# Altium PCB Flight_Controller.PcbDoc (part 1 of 4)
Units mil, origin at the board's own origin, x right, y up, seen from the top; angles counter-clockwise.
Board outline 2353.5 x 3084.1 mil, 4 copper layers (Top Layer, Layer 2, Layer 1, Bottom Layer), stack 62.48 mil thick; 95 components, 80 nets, 358 pads, 134 vias.
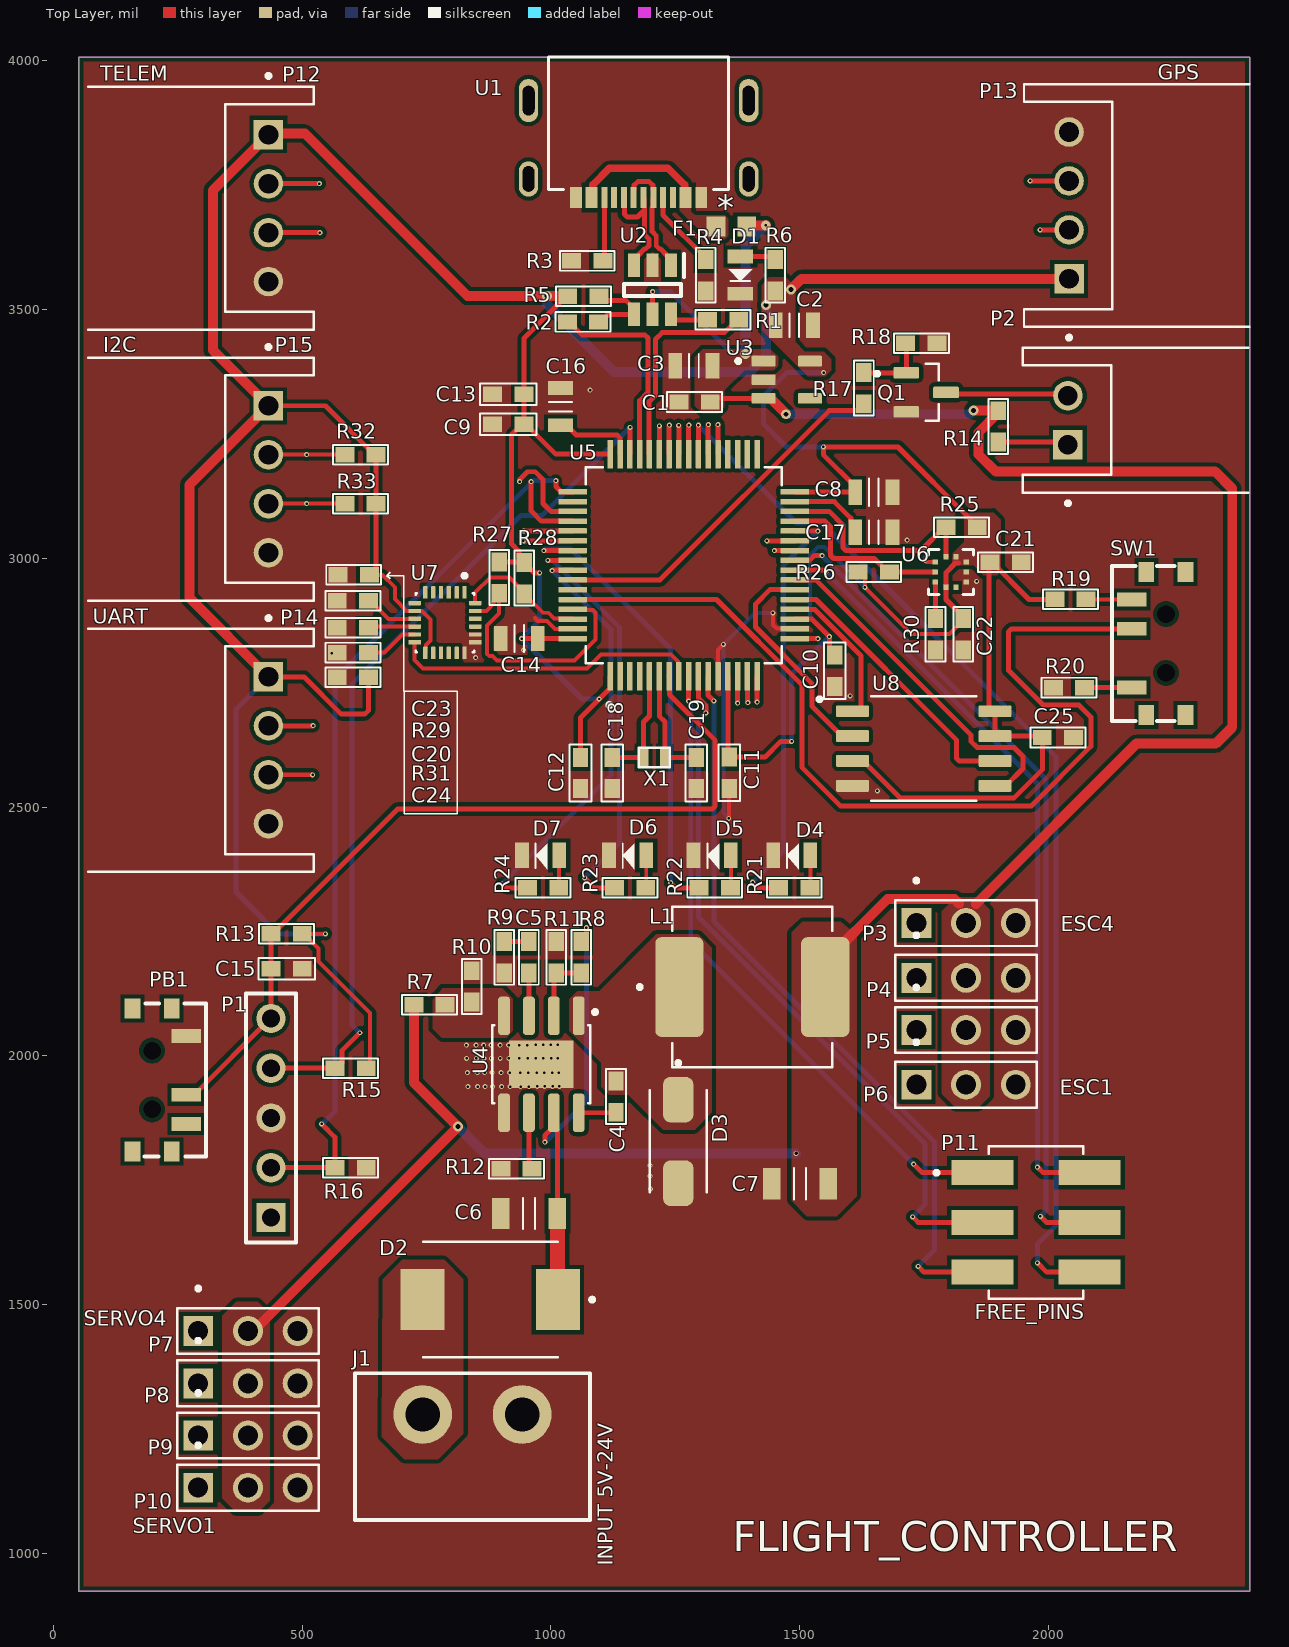
[diagram p0: Top Layer view]
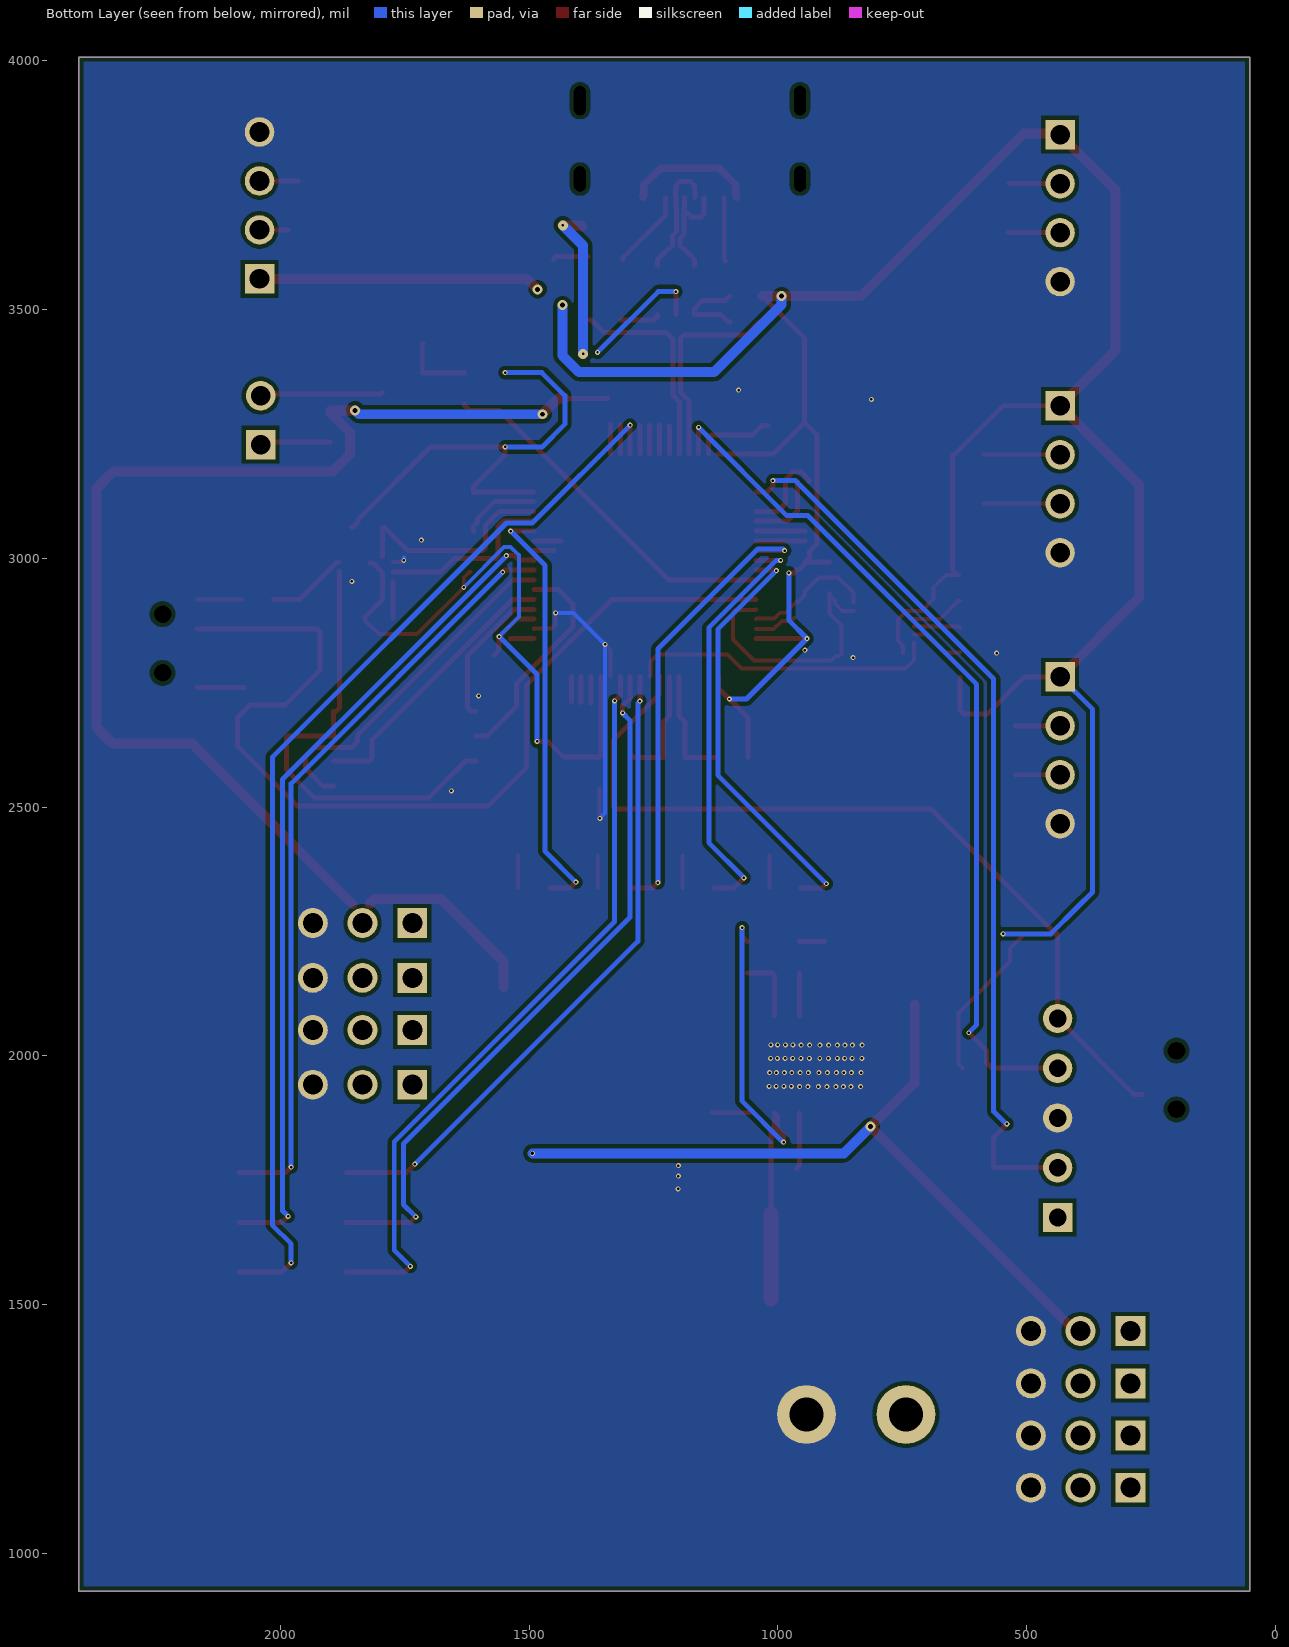
[diagram p1: Bottom Layer view, seen from below]
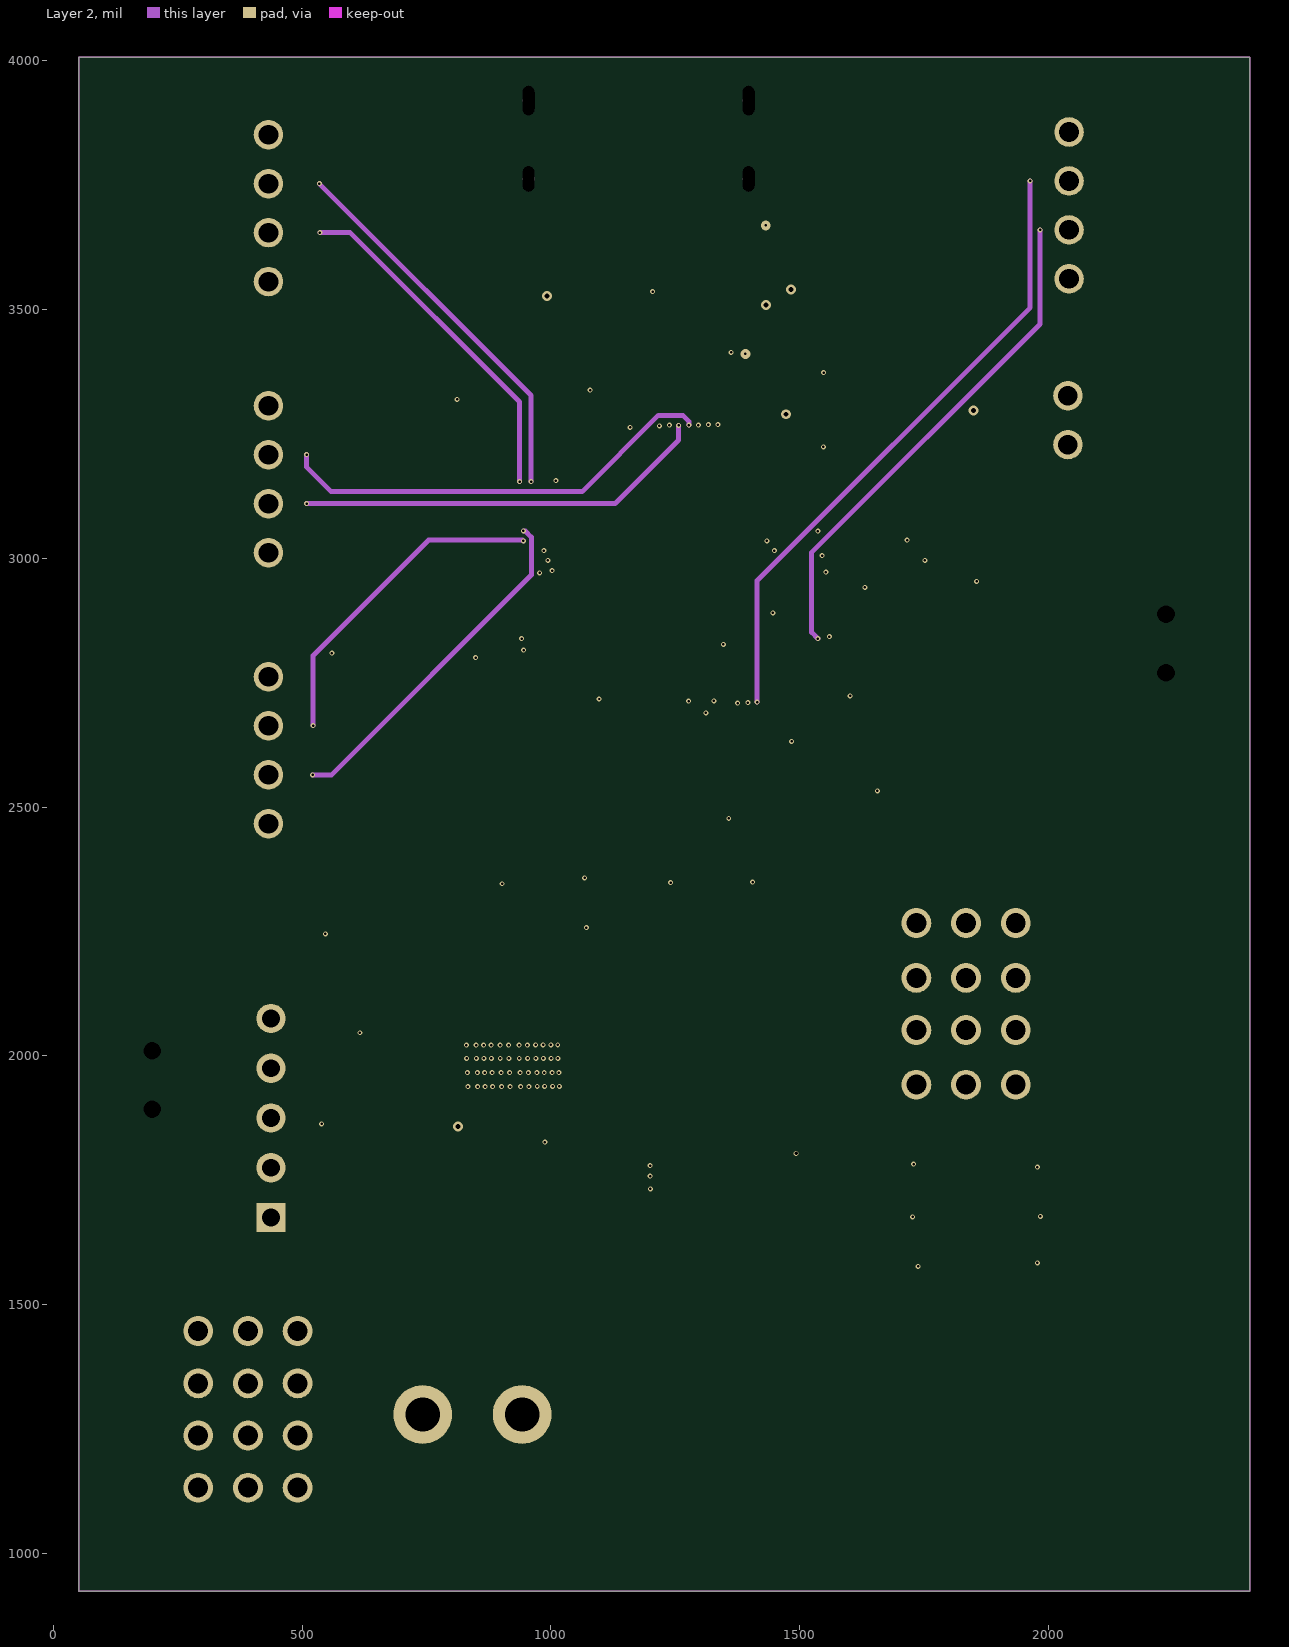
[diagram p2: Layer 2]
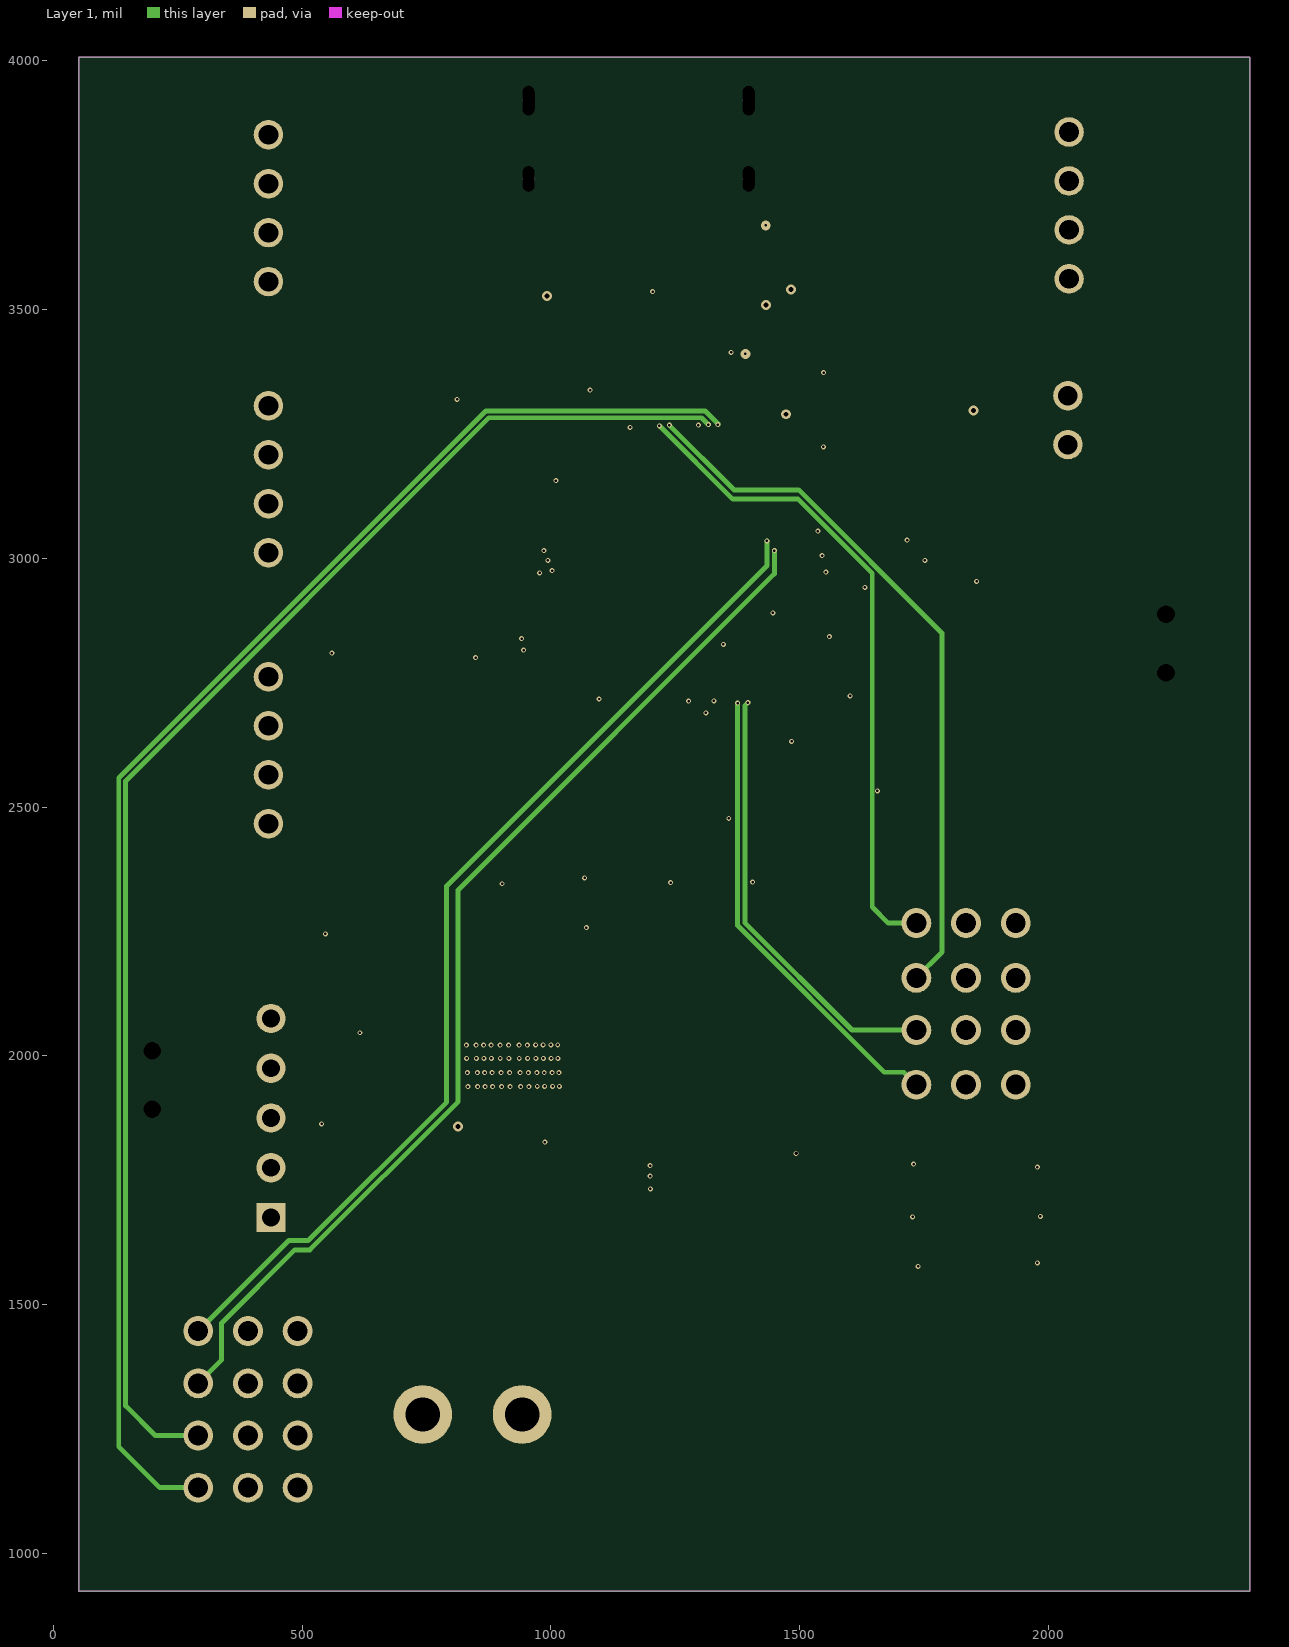
[diagram p3: Layer 1]
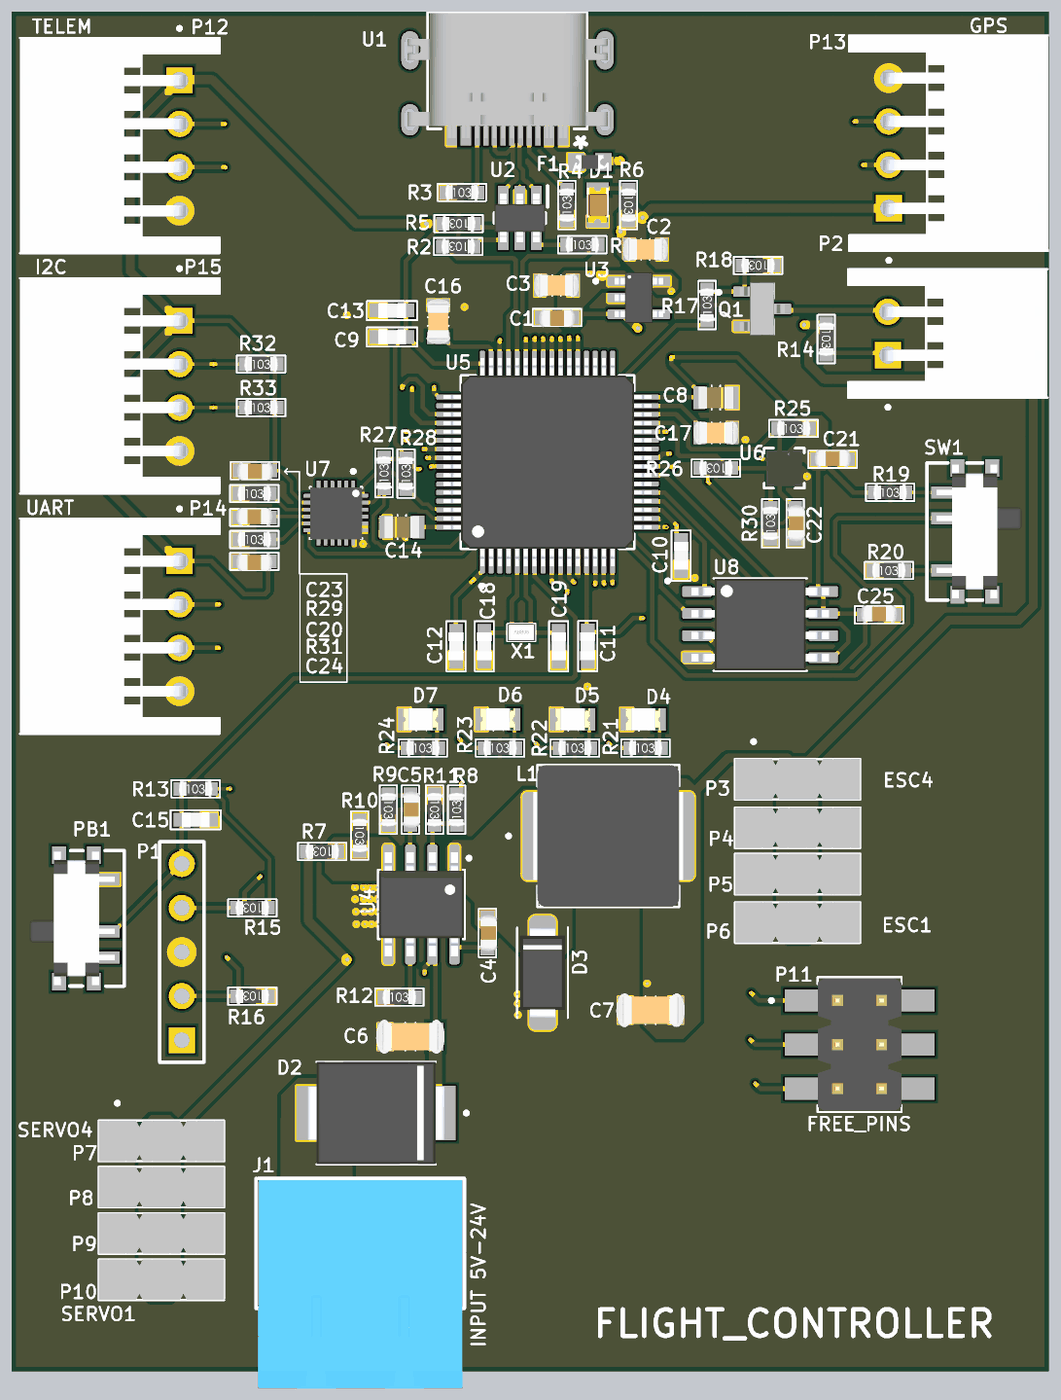
[diagram p5: 3D render of the assembled board from above, using the file's embedded part models]

## Layer stack, top to bottom
Top Solder: solder mask 0.4, Solder Resist, Dk 3.5
Top Layer: signal copper 1.4173
Dielectric 2: prepreg 8.2677, PP-006, Dk 4.1
Layer 2: signal copper 0.5906
Dielectric 1: dielectric 41.9291, FR-4, Dk 4.8
Layer 1: signal copper 0.5906
Dielectric 3: prepreg 8.2677, PP-006, Dk 4.1
Bottom Layer: signal copper 1.4173
Board Layer Stack Bottom Solder: solder mask 0.4, Solder Resist, Dk 3.5

## Board outline
51.5,923.9 51.5,4008 2405,4008 2405,923.9

## Design rules (kind name [scope] priority, off if disabled: settings)
Clearance [All] p1: gap=8 ignorepadtopadclearanceinfootprint=FALSE except(0: Arc-Hole Track-Hole SMDPad-SMDPad SMDPad-Hole THPad-Hole Via-Hole Fill-Hole Poly-Hole Region-Hole Text-Hole; 6: Arc-Arc Arc-Track Arc-SMDPad Arc-THPad Arc-Via Track-Track Track-SMDPad Track-THPad Track-Via SMDPad-THPad SMDPad-Via THPad-Via Via-Via)
DiffPairsRouting DiffPairsRouting_1 [InDifferentialPairClass('DIFFPAIRUSB')] p1: maxlimit=10 minlimit=10 mostfreqgap=10 toplayer_minwidth=15 toplayer_maxwidth=15 toplayer_prefwidth=15 midlayer1_minwidth=15 midlayer1_maxwidth=15 midlayer1_prefwidth=15 midlayer2_minwidth=15 midlayer2_maxwidth=15 midlayer2_prefwidth=15 bottomlayer_minwidth=15 bottomlayer_maxwidth=15 bottomlayer_prefwidth=15 maxuncoupledlength=500
DiffPairsRouting [All] p2: maxlimit=10 minlimit=5 mostfreqgap=5 toplayer_minwidth=10 toplayer_maxwidth=15 toplayer_prefwidth=10 midlayer1_minwidth=10 midlayer1_maxwidth=15 midlayer1_prefwidth=10 midlayer2_minwidth=10 midlayer2_maxwidth=15 midlayer2_prefwidth=10 bottomlayer_minwidth=10 bottomlayer_maxwidth=15 bottomlayer_prefwidth=10 maxuncoupledlength=500
MatchedLengths [InDifferentialPairClass('DIFFPAIRUSB')] p1: tolerance=1000 checknetsindiffpair=FALSE checkdiffpairvsdiffpair=TRUE checkxsignals=TRUE checkothers=TRUE
MinimumSolderMaskSliver [All] p1: minsoldermaskwidth=3
PlaneClearance [All] p1: clearance=15
PlaneConnect [All] p1: planeconnectstyle=Direct reliefexpansion=20 reliefentries=4 reliefconductorwidth=10 reliefairgap=10
PolygonConnect [All] p1: connectstyle=Direct reliefconductorwidth=10 reliefentries=4 polygonreliefangle="90 Angle" airgapwidth=10
RoutingVias [All] p1: holewidth=15 width=30 viastyle="Through Hole" minholewidth=10 minwidth=15 maxholewidth=50 maxwidth=100
SilkToSilkClearance [All] p1: silktosilkclearance=3
SilkToSolderMaskClearance [IsPad] p1: minsilkscreentomaskgap=3 clearancetoexposedcopper=TRUE
SolderMaskExpansion [All] p1: expansion=4 istentingtop=FALSE
Width [All] p1: maxlimit=50 minlimit=8 preferedwidth=10
24 further rules are at their usual default settings.

## Classes and differential pairs
differential pair class DIFFPAIRUSB: USB
component class POWER: C1 C2 C3 C4 C5 C6 C7 D1 D2 D3 F1 J1 L1 R1 R2 R3 R4 R5 R6 R7 R8 R9 R10 R11 R12 U1 U2 U3 U4
component class MODULES: C20 C21 C22 C23 C24 C25 P12 P13 P14 P15 R25 R26 R27 R28 R29 R30 R31 R32 R33 U6 U7 U8
component class MICROCONTROLLER: C8 C9 C10 C11 C12 C13 C14 C15 C16 C17 C18 C19 D4 D5 D6 D7 J2 P1 P2 P3 P4 P5 P6 P7 P8 P9 P10 P11 PB1 Q1 R13 R14 R15 R16 R17 R18 R19 R20 R21 R22 R23 R24 SW1 U5 X1
differential pair USB_CONN: +NetR2_2 -NetR1_2
differential pair USB: +USB_P -USB_N

## Components (designator, comment, footprint, x,y, rotation, side; value= is the part's Value field where it differs from the comment)
C1 "0603B103K160CT" CAP_0603#1 1289.1,3314.4 r0 top
C2 "CL21B105KBFNNNE" CAP_0805#1 1489.7,3468.9 r180 top
C3 "CL21B105KBFNNNE" CAP_0805#1 1287.7,3387.1 r0 top
C4 "C0603C104K5RACTU" CAP_0603#1 1131.2,1917.9 r90 top
C5 "CL10C200JB8NNNC" CAP_0603#1 956.2,2197.9 r90 top
C6 "C3216X5R1E336M160AC" CAP_1206 956.2,1682.9 r0 top
C7 "C3216X5R1E336M160AC" CAP_1206 1501.2,1742.9 r0 top
C8 "CL21A475KAQNNNE" CAP_0805#2 1649.5,3132.6 r180 top
C9 "CAP CER 100nF 0603" CAP_0603#2 914.6,3270 r0 top
C10 "CAP CER 100nF 0603" CAP_0603#2 1570.7,2774.1 r90 top
C11 "CAP CER 100nF 0603" CAP_0603#2 1358.7,2568.9 r90 top
C12 "CAP CER 100nF 0603" CAP_0603#2 1059.79,2568.48 r90 top
C13 "CAP CER 100nF 0603" CAP_0603#2 914.6,3330 r0 top
C14 "CAP_CER_1uF 0805" CAP_0805#2 936.7,2838.9 r0 top
C15 "CAP CER 100nF 0603" CAP_0603#2 469,2175 r180 top
C16 "CL21B105KBFNNNE" CAP_0805#1 1019.6,3305 r270 top
C17 "CL21B105KBFNNNE" CAP_0805#1 1649.5,3052.6 r180 top
C18 "CAP_CER_20pF" CAP_0603#2 1124,2568.48 r90 top
C19 "CAP_CER_20pF" CAP_0603#2 1292.74,2568.48 r90 top
C20 "0603B103K160CT" CAP_0603#1 602.3,2860.7 r180 top
C21 "0603B103K160CT" CAP_0603#1 1914.5,2992.6 r180 top
C22 "0603B103K160CT" CAP_0603#1 1829.5,2847.48 r90 top
C23 "0603B103K160CT" CAP_0603#1 603.79,2966.96 r0 top
C24 "0603B103K160CT" CAP_0603#1 602.3,2760.7 r0 top
C25 "0603B103K160CT" CAP_0603#1 2019.7,2639.9 r180 top
D1 "LH R974-LP-1" LED_RED_0805 1381.4,3569.4 r90 top
D2 "MBRS320" DIOM7959 878.5,1509.7 r180 top
D3 "B340A-13F" DIOM522 1256.2,1827.9 r270 top
D4 "LED_GREEN_0805" LED_GREEN_0805 1484.6,2402.8 r0 top
D5 "LED_GREEN_0805" LED_GREEN_0805 1324.6,2402.8 r0 top
D6 "LED_GREEN_0805" LED_GREEN_0805 1154.6,2402.8 r0 top
D7 "LED_GREEN_0805" LED_GREEN_0805 979.6,2402.8 r0 top
F1 "FUSE_PTC" FUSE_0603 1363.2,3667.1 r180 top
J1 "TBP01R1-508-02BE" TBP01R1-508 842.48,1279 r0 top
L1 "IND 15uH 3232" INDM868 1405.2,2138.2 r0 top
P1 "Header 5" HDR1X5 437.5,1675 r90 top
P2 "Connector Header Through Hole" S2B-XH-A 2039.8,3278.01 r90 top
P3 "Header 3 pin" "5-146281-3 header" 1834.9,2266.8 r0 top
P4 "Header 3 pin" "5-146281-3 header" 1834.9,2156.8 r0 top
P5 "Header 3 pin" "5-146281-3 header" 1834.9,2051.8 r0 top
P6 "Header 3 pin" "5-146281-3 header" 1834.9,1941.8 r0 top
P7 "Header 3 pin" "5-146281-3 header" 391.3,1446.6 r0 top
P8 "Header 3 pin" "5-146281-3 header" 391.3,1341.6 r0 top
P9 "Header 3 pin" "5-146281-3 header" 391.3,1236.6 r0 top
P10 "Header 3 pin" "5-146281-3 header" 391.3,1131.6 r0 top
P11 "Connector 2x3 SMD" AMPHENOL 1975.5,1665 r270 top
P12 "HEADER 4 PIN" S4B-XH-A 432.5,3704.21 r270 top
P13 "HEADER 4 PIN" S4B-XH-A 2042,3709.59 r90 top
P14 "HEADER 4 PIN" S4B-XH-A 432.5,2614.21 r270 top
P15 "HEADER 4 PIN" S4B-XH-A 432.5,3159.21 r270 top
PB1 "EG1215AA" EG1215AA#1 198.5,1951.3 r270 top
Q1 "BC817" SOT95P23 1754.8,3333.8 r0 top
R1 "RC0603FR-0710KL" RES_0603#1 1346.4,3479.4 r0 top
R2 "RC0603FR-0710KL" RES_0603#1 1064.8,3475.3 r180 top
R3 "RC0603FR-0710KL" RES_0603#1 1073.3,3598 r0 top
R4 "RC0603FR-0710KL" RES_0603#1 1311.4,3569.4 r90 top
R5 "RC0603FR-0710KL" RES_0603#1 1065.7,3527.2 r180 top
R6 "RC0603FR-0710KL" RES_0603#1 1451.4,3569.4 r270 top
R7 "RC0603JR-07220KL" RES_0603#1 756.2,2102.9 r180 top
R8 "RC0603JR-07220KL" RES_0603#1 1061.2,2197.9 r90 top
R9 "RC0603JR-07220KL" RES_0603#1 906.2,2197.9 r270 top
R10 "RC0603JR-07220KL" RES_0603#1 841.2,2139.4 r270 top
R11 "RC0603JR-0743KL" RES_0603#1 1011.2,2197.9 r270 top
R12 "RC0603JR-07220KL" RES_0603#1 931.2,1772.9 r0 top
R13 "RC0603FR-0710KL" RES_0603#1 469,2245 r0 top
R14 "RC0603JR-0715RL" RES_0603#1 1899.8,3265.3 r270 top
R15 "RC0603FR-0710KL" RES_0603#2 597.5,1975 r180 top
R16 "RC0603FR-0710KL" RES_0603#2 597.5,1775 r180 top
R17 "RC0603FR-0710KL" RES_0603#1 1629.7,3342.4 r90 top
R18 "RC0603FR-0710KL" RES_0603#1 1745.1,3432.3 r180 top
R19 "RC0603FR-0710KL" RES_0603#1 2045,2917.48 r0 top
R20 "RC0603FR-0710KL" RES_0603#1 2041.9,2740.32 r0 top
R21 "RC0603FR-0710KL" RES_0603#1 1489.6,2337.8 r0 top
R22 "RC0603FR-0710KL" RES_0603#1 1329.6,2337.8 r0 top
R23 "RC0603FR-0710KL" RES_0603#1 1159.6,2337.8 r0 top
R24 "RC0603FR-0710KL" RES_0603#1 984.6,2337.8 r0 top
R25 "RC0603FR-0710KL" RES_0603#1 1826,3062.6 r0 top
R26 "RC0603FR-0710KL" RES_0603#1 1649.5,2972.6 r180 top
R27 "RC0603FR-0710KL" RES_0603#1 896.4,2961.5 r90 top
R28 "RC0603FR-0710KL" RES_0603#1 946.4,2960.3 r90 top
R29 "RC0603FR-0710KL" RES_0603#1 602.3,2914.72 r0 top
R30 "RC0603FR-0710KL" RES_0603#1 1773.5,2847.48 r90 top
R31 "RC0603FR-0710KL" RES_0603#1 602.3,2810.7 r0 top
R32 "RC0603FR-0710KL" RES_0603#1 617.5,3208.43 r0 top
R33 "RC0603FR-0710KL" RES_0603#1 617.5,3110 r0 top
SW1 "EG1215AA" EG1215AA#2 2236.9,2828.9 r90 top
U1 "USB_C 24PIN" USB_2169900002 1176.6,3875.1 r180 top
U2 "USB_LC62" SOT-23-6 1204.6,3539.7 r270 top
U3 "NCP718B" SOT95-P 1474.6,3359.3 r0 top
U4 "MP1584EN" SOIC127 981.2,1982.9 r270 top
U5 "STM32F405RGT6" QFP50P_STM32 1267.4,2986.2 r90 top
U6 "BMP390" WFLGA-10 1804.5,2972.6 r270 top
U7 "I" TFQFN-24 787.3,2870.7 r270 top
U8 "25LC1024 EEPROM" SOIJ8 1750,2617.7 r0 top
X1 "CRYSTAL 32.768kHz" ABS05-32.768KHZ-T 1208.02,2599.98 r0 top

## Footprints (in the part's own frame and the unit in brackets; to place one, negate y for a bottom-side part, rotate by r counter-clockwise, add the part's x,y. Pads: shape width x height; smd on the part's side, far side on the other; paste and mask are expansions set on the pad)
"5-146281-3 header" [mm]
  rect 1.53x1.53 / inner round 1.53 / far side rect 1.53x1.53 hole 1.02: 1(-2.54,0)
  round 1.53 hole 1.02: 2(0,0) 3(2.54,0)
  silkscreen extent -3.61,-1.17 3.61,2.27, body extent -3.61,-1.17 3.61,1.17, height 5.33
ABS05-32.768KHZ-T [mm]
  rect 0.5x1 smd: 1(-0.55,0) 2(0.55,0)
  silkscreen extent -0.8,-0.5 0.8,0.5, body extent -0.8,-0.5 0.8,0.5, height 0.5
AMPHENOL [mm]
  rect 1.27x3.18 smd: A01(-2.54,-2.73) A02(0,-2.73) A03(2.54,-2.73) B01(-2.54,2.73) B02(0,2.73) B03(2.54,2.73)
  silkscreen extent -3.89,-5.18 3.89,2.41, body extent -3.81,-3.68 3.81,3.68, height 8.59
CAP_0603#1 [mil]
  rect 38x31 smd mask+1.97: 1(-31.5,0) 2(31.5,0)
  silkscreen extent -55,-20 55,20, body extent -41,-22 41,18, height 31
CAP_0603#2 [mil]
  rect 38x31 smd mask+4: 1(-31.5,0) 2(31.5,0)
  silkscreen extent -57,-22 57,22, body extent -31,-17 31,17, height 34
CAP_0805#1 [mm]
  rect 0.7x1.3 smd mask+0.05: 1(-0.95,0) 2(0.95,0)
  silkscreen extent -0.25,-0.6 0.25,0.6, body extent -1.3,-0.68 1.3,0.68, height 0.9
CAP_0805#2 [mm]
  rect 0.7x1.3 smd mask+0.102: 1(-0.95,0) 2(0.95,0)
  silkscreen extent -0.25,-0.7 0.25,0.7, body extent -1,-0.63 1,0.63, height 1.35
CAP_1206 [mm]
  rect 0.9x1.6 smd mask+0.05: 1(-1.45,0) 2(1.45,0)
  silkscreen extent -0.3,-0.8 0.3,0.8, body extent -1.97,-0.98 1.97,0.98, height 1.3
DIOM522 [mm]
  rrect50% 2.33x1.55 smd: A(2.135,0) C(-2.135,0)
  silkscreen extent -4.1,-1.46 2.6,1.46, body extent -2.6,-1.3 2.6,1.3, height 2.4
DIOM7959 [mm]
  rect 2.25x3.12 smd: A(3.455,0) C(-3.455,0)
  silkscreen extent -5.3,-2.95 3.44,2.95, body extent -3.98,-2.95 3.98,2.95, height 2.62
EG1215AA#1 [mm]
  rect 0.7x1.5 smd mask+0.102: 1(-2.25,1.75) 2(0.75,1.75) 3(2.25,1.75)
  rect 1x0.8 smd mask+0.102: " "(-3.65,-1) " "(-3.65,1) " "(3.65,-1) " "(3.65,1)
  round 0 hole 0.9 mask+0.102: ""(-1.5,0) ""(1.5,0)
  silkscreen extent -3.9,-0.38 3.9,2.75, body extent -3.85,-2.7 3.85,2.2, height 1.4
EG1215AA#2 [mm]
  rect 0.7x1.5 smd mask+0.05: 1(-2.25,1.75) 2(0.75,1.75) 3(2.25,1.75)
  rect 1x0.8 smd mask+0.05: ""(-3.65,-1) ""(-3.65,1) ""(3.65,-1) ""(3.65,1)
  round 0 hole 0.9 mask+0.05: ""(-1.5,0) ""(1.5,0)
  silkscreen extent -3.95,-0.45 3.95,2.75, body extent -3.85,-2.7 3.85,2.2, height 1.38
FUSE_0603 [mm]
  rect 0.95x1.02 smd paste+0 mask+0.102: 1(-0.785,0) 2(0.785,0)
  body extent -0.8,-0.4 0.8,0.4, height 0.75
HDR1X5 [mm] "Connector; Header; 5 Position"
  rect 1.5x1.5 hole 0.9: 1(0,0)
  round 1.5 hole 0.9: 2(2.54,0) 3(5.08,0) 4(7.62,0) 5(10.16,0)
  silkscreen extent -1.27,-1.27 11.43,1.27
INDM868 [mm]
  rrect25% 2.46x5.09 smd paste+0 mask+0.102: 1(-3.725,0) 2(3.725,0)
  silkscreen extent -5.85,-4.09 4.09,4.09, body extent -4.32,-4.09 4.32,4.09, height 4.01
LED_GREEN_0805 [mm]
  rect 0.7x1.3 smd mask+0.102: 1(-0.95,0) 2(0.95,0)
  silkscreen extent -0.25,-0.7 0.35,0.6, body extent -1,-0.63 1,0.63, height 0.8
LED_RED_0805 [mm]
  rect 0.7x1.3 smd mask+0.05: 1(-0.95,0) 2(0.95,0)
  silkscreen extent -0.3,-0.6 0.3,0.6, body extent -1.01,-0.63 1.01,0.62, height 1.1
QFP50P_STM32 [mm]
  rrect25% 1.47x0.28 smd: 1(-5.67,3.75) 2(-5.67,3.25) 3(-5.67,2.75) 4(-5.67,2.25) 5(-5.67,1.75) 6(-5.67,1.25) 7(-5.67,0.75) 8(-5.67,0.25) 9(-5.67,-0.25) 10(-5.67,-0.75) 11(-5.67,-1.25) 12(-5.67,-1.75) 13(-5.67,-2.25) 14(-5.67,-2.75) 15(-5.67,-3.25) 16(-5.67,-3.75) 33(5.67,-3.75) 34(5.67,-3.25) 35(5.67,-2.75) 36(5.67,-2.25) 37(5.67,-1.75) 38(5.67,-1.25) 39(5.67,-0.75) 40(5.67,-0.25) 41(5.67,0.25) 42(5.67,0.75) 43(5.67,1.25) 44(5.67,1.75) 45(5.67,2.25) 46(5.67,2.75) 47(5.67,3.25) 48(5.67,3.75)
  rrect25% 0.28x1.47 smd: 17(-3.75,-5.67) 18(-3.25,-5.67) 19(-2.75,-5.67) 20(-2.25,-5.67) 21(-1.75,-5.67) 22(-1.25,-5.67) 23(-0.75,-5.67) 24(-0.25,-5.67) 25(0.25,-5.67) 26(0.75,-5.67) 27(1.25,-5.67) 28(1.75,-5.67) 29(2.25,-5.67) 30(2.75,-5.67) 31(3.25,-5.67) 32(3.75,-5.67) 49(3.75,5.67) 50(3.25,5.67) 51(2.75,5.67) 52(2.25,5.67) 53(1.75,5.67) 54(1.25,5.67) 55(0.75,5.67) 56(0.25,5.67) 57(-0.25,5.67) 58(-0.75,5.67) 59(-1.25,5.67) 60(-1.75,5.67) 61(-2.25,5.67) 62(-2.75,5.67) 63(-3.25,5.67) 64(-3.75,5.67)
  silkscreen extent -7.24,-5 5,5, body extent -6,-6 6,6, height 1.6
RES_0603#1 [mil]
  rect 38x31 smd mask+1.97: 1(-31.5,0) 2(31.5,0)
  silkscreen extent -55,-20 55,20, body extent -39,-19 39,20, height 17
RES_0603#2 [mil]
  rect 38x31 smd mask+4: 1(-31.5,0) 2(31.5,0)
  silkscreen extent -55,-20 55,20, body extent -39,-19 39,20, height 17
S2B-XH-A [mm]
  rect 1.508x1.508 / inner round 1.508 / far side rect 1.508x1.508 hole 1: 1(-1.25,0)
  round 1.508 hole 1: 2(1.25,0)
  silkscreen extent -4.35,-9.2 3.7,2.3, body extent -3.7,-9.2 3.7,2.3, height 6.1
S4B-XH-A [mm]
  rect 1.508x1.508 / inner round 1.508 / far side rect 1.508x1.508 hole 1: 1(-3.75,0)
  round 1.508 hole 1: 2(-1.25,0) 3(1.25,0) 4(3.75,0)
  silkscreen extent -6.85,-9.2 6.2,2.3, body extent -6.2,-9.2 6.2,2.3, height 6.1
SOIC127 [mm]
  rrect54% 1.97x0.6 smd paste+0 mask+0.102: 1(-2.475,1.905) 2(-2.475,0.635) 3(-2.475,-0.635) 4(-2.475,-1.905) 5(2.475,-1.905) 6(2.475,-0.635) 7(2.475,0.635) 8(2.475,1.905)
  rect 2.41x3.3 smd paste-3 mask+0.102: 9(0,0)
  silkscreen extent -2.77,-2.5 2,2.84, body extent -3,-2.45 3,2.45, height 1.7
SOIJ8 [mm]
  rrect25% 1.69x0.61 smd: 1(-3.64,1.905) 2(-3.64,0.635) 3(-3.64,-0.635) 4(-3.64,-1.905) 5(3.64,-1.905) 6(3.64,-0.635) 7(3.64,0.635) 8(3.64,1.905)
  silkscreen extent -5.43,-2.67 2.69,2.67, body extent -3.97,-2.63 3.97,2.63, height 2.03
SOT95-P [mm]
  rrect25% 1.24x0.55 smd: 1(-1.185,0.95) 2(-1.185,0) 3(-1.185,-0.95) 4(1.185,-0.95) 5(1.185,0.95)
  silkscreen extent -2.58,0.85 -2.38,1.05, body extent -1.4,-1.45 1.4,1.45, height 1
SOT95P23 [mm]
  rrect25% 1.32x0.59 smd: 1(-1.015,1) 2(-1.015,-1) 3(1.015,0)
  silkscreen extent -2.6,-1.46 0.65,1.46, body extent -1.31,-1.52 1.29,1.52, height 1.2
SOT-23-6 [mm]
  rect 1.2x0.6 smd: 1(-1.25,0.95) 2(-1.25,0) 3(-1.25,-0.95) 4(1.25,-0.95) 5(1.25,0) 6(1.25,0.95)
  silkscreen extent -1.85,-1.46 0.3,1.6, body extent -1.4,-1.46 1.4,1.46, height 1.4
TBP01R1-508 [mm]
  round 3 hole 1.75 mask+0.05: 1(-2.54,0) 2(2.54,0)
  silkscreen extent -6,-5.4 6,2.1, body extent -5.88,-10 5.88,2, height 8.55
TFQFN-24 [mm]
  rrect25% 0.64x0.22 smd: 1(-1.545,1) 2(-1.545,0.6) 3(-1.545,0.2) 4(-1.545,-0.2) 5(-1.545,-0.6) 6(-1.545,-1) 13(1.545,-1) 14(1.545,-0.6) 15(1.545,-0.2) 16(1.545,0.2) 17(1.545,0.6) 18(1.545,1)
  rrect25% 0.22x0.64 smd: 7(-1,-1.545) 8(-0.6,-1.545) 9(-0.2,-1.545) 10(0.2,-1.545) 11(0.6,-1.545) 12(1,-1.545) 19(1,1.545) 20(0.6,1.545) 21(0.2,1.545) 22(-0.2,1.545) 23(-0.6,1.545) 24(-1,1.545)
  silkscreen extent -2.5,-1.5 1.5,1.5, body extent -1.49,-1.49 1.51,1.51, height 1
USB_2169900002 [mil]
  oval 39x87 smd: 13(-221.26,-45.23) 14(221.26,-45.24)
  oval 39x71 smd: 15(-221.26,112.25) 16(221.26,112.24)
  rect 24x43 smd: A1/B12(-126,149.5) A4/B9(-94.5,149.5) B1/A12(126.01,149.5) B4/A9(94.51,149.5)
  rect 12x43 smd: A5(-49.23,149.5) A6(-9.84,149.5) A7(9.85,149.5) A8(49.23,149.5) B5(68.91,149.5) B6(29.54,149.5) B7(-29.53,149.5) B8(-68.91,149.5)
  round 24 hole 24.02 slot 59.06 at 90 deg unplated: ""(-221.26,-45.23) ""(221.26,-45.24)
  round 24 hole 24 slot 51.18 at 90 deg unplated: ""(-221.26,112.25) ""(221.26,112.24)
  silkscreen extent -181,-133 181,133, body extent -227,-130 227,154, height 94
WFLGA-10 [mil]
  rect 11x10 smd paste+0 mask+0: 1(-31,9.84) 2(-31,-9.84) 6(31,-9.84) 7(31,9.84)
  rect 10x11 smd paste+0 mask+0: 3(-19.68,-31) 4(0,-31) 5(19.68,-31) 8(19.68,31) 9(0,31) 10(-19.68,31)
  silkscreen extent -46,-45 46,46, body extent -41,-41 41,41, height 32

## Part data
C1 C20 C21 C22 C23 C24 C25: library part "CAP CER 10nF 0603", "CAP CER 10nF %10 0603", Capacitance=10nF, Case Code (Metric)=1608, Case Code (Imperial)=0603, Dielectric=X7R, Manufacturer="Walsin Technologies", Max Operating Temperature=125°C, Min Operating Temperature=-55°C, Supplier Part Number 1=1292-1384-1-ND, Tolerance=10%, Voltage Rating=16V, Case/Package=0603, Category="Ceramic Capacitors", ComponentLink1Description=http://www.farnell.com/datasheets/1958513.pdf?src-supplier=Farnell, ComponentLink1URL=http://www.farnell.com/datasheets/1958513.pdf?src-supplier=Farnell, ComponentLink2Description=http://components.arrow.com/part/dataview/0323_00656382?src-supplier=Arrow+Europe, ComponentLink2URL=http://components.arrow.com/part/dataview/0323_00656382?src-supplier=Arrow+Europe, ComponentLink3Description=http://www.farnell.com/datasheets/1958513.pdf?src-supplier=Element14, ComponentLink3URL=http://www.farnell.com/datasheets/1958513.pdf?src-supplier=Element14, ComponentLink4Description=http://www.passivecomponent.com/wp-content/uploads/2018/10/MLCC.pdf?src-supplier=Digi-Key, ComponentLink4URL=http://www.passivecomponent.com/wp-content/uploads/2018/10/MLCC.pdf?src-supplier=Digi-Key, Depth=0.8mm, Designed by=BERK, Length=1.6mm, Manufacturer Part Number=0603B103K160CT, Packaging="Tape and Reel", Pricing 1="1=0,10000, 10=0,03600, 50=0,01940, 100=0,01590, 500=0,01136, 1000=0,00892 (USD)", REACH SVHC=Unknown, RoHS=Yes, RoHS Compliant=Yes, Stock 1=102474, Supplier 1=Digi-Key, Voltage Rating (DC)=16V
C2 C3 C16 C17: library part "CAP CER 1uF 0805", "CAP CER 1uF %10 0805", Capacitance=1uF, Case Code (Metric)=2012, Case Code (Imperial)=0805, Dielectric=X7R, Manufacturer=Samsung, Max Operating Temperature=125°C, Min Operating Temperature=-55°C, Package Quantity=1, Supplier Part Number 1=1276-1029-2-ND, Tolerance=10%, Voltage=50V, Case/Package=0805, Category="Ceramic Capacitors", ComponentLink1Description=https://datasheet.ciiva.com/25800/cl21b105kbfnnne-25800291.pdf?src-supplier=Digi-Key, ComponentLink1URL=https://datasheet.ciiva.com/25800/cl21b105kbfnnne-25800291.pdf?src-supplier=Digi-Key, ComponentLink2Description=https://datasheet.ciiva.com/16449/cl21b105kbfnnne-16449003.pdf?src-supplier=Future+Electronics, ComponentLink2URL=https://datasheet.ciiva.com/16449/cl21b105kbfnnne-16449003.pdf?src-supplier=Future+Electronics, ComponentLink3Description=https://datasheet.ciiva.com/26838/getdatasheetpartid-354075-26838668.pdf?src-supplier=Verical, ComponentLink3URL=https://datasheet.ciiva.com/26838/getdatasheetpartid-354075-26838668.pdf?src-supplier=Verical, Construction=Flat, Depth=1.25mm, Designed by=BERK, Height=1.25mm, Length=2mm, Manufacturer Part Number=CL21B105KBFNNNE, Mount="Surface Mount", Packaging="Tape and Reel", Pricing 1="2000=0,02138, 4000=0,01956 (USD)", Radiation Hardening=No, RoHS=Yes, RoHS Compliant=Yes, Series=CL, Stock 1=958000, Supplier 1=Digi-Key, Thickness=0.053inch, Voltage Rating=50V, Width=0.049inch
C4: library part "CAP CER 100nF 0603", "CAP CER 100nF %10 0603 SMD", Capacitance=100nF, Case Code (Metric)=1608, Case Code (Imperial)=0603, Dielectric=X7R, Dielectric Material=Ceramic, Manufacturer=KEMET, Max Operating Temperature=125°C, Min Operating Temperature=-55°C, Package Quantity=1, Supplier Part Number 1=399-5089-1-ND, Tolerance=10%, Voltage=50V, Case/Package=0603, Category="Ceramic Capacitors", ComponentLink1Description=https://datasheet.ciiva.com/7823/kem-c1002-x7r-smd-7823591.pdf?src-supplier=Element14, ComponentLink1URL=https://datasheet.ciiva.com/7823/kem-c1002-x7r-smd-7823591.pdf?src-supplier=Element14, ComponentLink2Description=https://datasheet.ciiva.com/14602/70095383-14602583.pdf?src-supplier=Allied+Electronics, ComponentLink2URL=https://datasheet.ciiva.com/14602/70095383-14602583.pdf?src-supplier=Allied+Electronics, ComponentLink3Description=https://datasheet.ciiva.com/5999/kem-c1002-x7r-smd-5999400.pdf?src-supplier=Farnell, ComponentLink3URL=https://datasheet.ciiva.com/5999/kem-c1002-x7r-smd-5999400.pdf?src-supplier=Farnell, ComponentLink4Description=https://datasheet.ciiva.com/7823/kem-c1002-x7r-smd-7823592.pdf?src-supplier=Element14, ComponentLink4URL=https://datasheet.ciiva.com/7823/kem-c1002-x7r-smd-7823592.pdf?src-supplier=Element14, ComponentLink5Description=https://datasheet.ciiva.com/28645/1851736-28645640.pdf?src-supplier=Element14, ComponentLink5URL=https://datasheet.ciiva.com/28645/1851736-28645640.pdf?src-supplier=Element14, ComponentLink6Description=https://datasheet.ciiva.com/14585/70095383-14585209.pdf?src-supplier=Allied+Electronics, ComponentLink6URL=https://datasheet.ciiva.com/14585/70095383-14585209.pdf?src-supplier=Allied+Electronics, Contact Plating=Tin,Matte, Depth=0.8mm, Designed by=BERK, Dissipation Factor=2.5%, Height=0.8mm, Lead Pitch=0.7mm, Length=0.063inch, Manufacturer Part Number=C0603C104K5RACTU, Mount="Surface Mount", Number of Pins=2, Packaging="Tape and Reel", Pricing 1="1=0,12000, 10=0,08500, 50=0,04620, 100=0,03770, 500=0,02696, 1000=0,02118 (USD)", Radiation Hardening=No, REACH SVHC="No SVHC", RoHS=Yes, RoHS Compliant=Yes, Series="SMD Comm X7R", Stock 1=1666186, Supplier 1=Digi-Key, Termination=SMD/SMT, Thickness=0.034inch, Voltage Rating=50V, Voltage Rating (DC)=50V, Width=0.031inch
C5: library part "CAP CER 20pF 0603", "CAP CER 20pF %5 0603 SMD", Capacitance=20pF, Case Code (Metric)=1608, Case Code (Imperial)=0603, Dielectric=C0G, Manufacturer=Samsung, Max Operating Temperature=125°C, Min Operating Temperature=-55°C, Package Quantity=1, Supplier Part Number 1=1276-1187-1-ND, Temperature Coefficient=300ppm/°C, Tolerance=5%, Voltage=50V, Case/Package=0603, Category="Ceramic Capacitors", ComponentLink1Description=https://datasheet.ciiva.com/26877/getdatasheetpartid-640634-26877974.pdf?src-supplier=Verical, ComponentLink1URL=https://datasheet.ciiva.com/26877/getdatasheetpartid-640634-26877974.pdf?src-supplier=Verical, ComponentLink2Description=https://datasheet.ciiva.com/26310/mlcc-catalogdownload2013-eng-26310315.pdf?src-supplier=Distrelec, ComponentLink2URL=https://datasheet.ciiva.com/26310/mlcc-catalogdownload2013-eng-26310315.pdf?src-supplier=Distrelec, Construction=Flat, Depth=0.8mm, Designed by=BERK, Height=0.8mm, Length=1.6mm, Manufacturer Part Number=CL10C200JB8NNNC, Mount="Surface Mount", Packaging="Tape and Reel", Pricing 1="1=0,10000, 10=0,04700, 50=0,02560, 100=0,02090, 500=0,01490, 1000=0,01171 (USD)", Radiation Hardening=No, RoHS=Yes, RoHS Compliant=Yes, Series=CL, Stock 1=765558, Supplier 1=Digi-Key, Thickness=0.035inch, Voltage Rating=50V, Width=0.031inch
C6 C7: library part "CAP CER 33uF 1206", "CAP CER 33uF %20 1206 SMD", Capacitance=33uF, Case Code (Metric)=3216, Case Code (Imperial)=1206, Dielectric=X5R, Dielectric Material=Ceramic, Manufacturer=TDK, Max Operating Temperature=85°C, Min Operating Temperature=-55°C, Package Quantity=1, Supplier Part Number 1=445-8046-1-ND, Tolerance=20%, Voltage Rating=25V, Case/Package=1206, Category="Ceramic Capacitors", ComponentLink1Description=https://datasheet.ciiva.com/24216/c3216x5r1e336m160ac-265051-24216512.pdf?src-supplier=Mouser, ComponentLink1URL=https://datasheet.ciiva.com/24216/c3216x5r1e336m160ac-265051-24216512.pdf?src-supplier=Mouser, ComponentLink2Description=https://datasheet.ciiva.com/6285/tdkmlcccaprange-6285278.pdf?src-supplier=Digi-Key, ComponentLink2URL=https://datasheet.ciiva.com/6285/tdkmlcccaprange-6285278.pdf?src-supplier=Digi-Key, Depth=1.6mm, Designed by=BERK, Lead Free="Lead Free", Length=3.2mm, Manufacturer Part Number=C3216X5R1E336M160AC, Mount="Surface Mount", Packaging="Tape and Reel", Pricing 1="1=1,04000, 10=0,82500, 50=0,71500, 100=0,61880, 500=0,46750, 1000=0,41250 (USD)", REACH SVHC="No SVHC", Resistor Type=Ceramic, RoHS=Yes, RoHS Compliant=Yes, Series=C, Stock 1=149381, Supplier 1=Digi-Key, Termination=SMD/SMT, Thickness=1.6mm, Voltage Rating (DC)=25V, Weight=0.000571oz, Width=0.063inch
C8: library part "CAP CER 4.7uF 0805", "Multilayer Ceramic Capacitor, 4.7 uF, 25 V, ± 10%, X5R, 0805 [2012 Metric]", Capacitance=4.7uF, Case Code (Metric)=2012, Case Code (Imperial)=0805, Dielectric=X5R, Manufacturer=Samsung, Max Operating Temperature=85°C, Min Operating Temperature=-55°C, Supplier Part Number 1=1276-1244-1-ND, Tolerance=10%, Voltage Rating=25V, Case/Package=0805, Category="Ceramic Capacitors", ComponentLink1Description=https://datasheet.ciiva.com/25798/cl21a475kaqnnne-25798882.pdf?src-supplier=Digikey, ComponentLink1URL=https://datasheet.ciiva.com/25798/cl21a475kaqnnne-25798882.pdf?src-supplier=Digikey, Construction=Flat, Depth=1.25mm, Height=1.25mm, Lead Free="Lead Free", Length=2mm, Manufacturer Part Number=CL21A475KAQNNNE, Material=Ceramic, Mount="Surface Mount", Packaging="Tape and Reel", Pricing 1="1=0,1, 10=0,069, 50=0,0414, 100=0,0326, 500=0,02408, 1000=0,01994 (USD)", Radiation Hardening=No, RoHS=Yes, RoHS Compliant=Yes, Series=CL, Stock 1=3190611, Supplier 1=Digikey, Voltage Rating (DC)=25V
C9 C10 C11 C12 C13 C15: "Multilayer Ceramic Capacitor, 0.1 uF, 50 V, ± 10%, X7R, 0603 [1608 Metric]", Capacitance=100nF, Case/Package=0603, Dielectric=X7R, Manufacturer=KEMET, Manufacturer Part Number=C0603C104K5RACTU, Max Operating Temperature=125°C, Min Operating Temperature=-55°C, Supplier Part Number 1=399-C0603C104K5RAC7867DKR-ND, Temperature Coefficient=30ppm/°C, Tolerance=10%, Voltage=50V, Category="Ceramic Capacitors", Lead Free=5697LeadFree, Length=0.063inch, Material=4241ConductorMaterial, Mount="Surface Mount", Packaging="Tape and Reel", Pricing 1="1=0,11, 10=0,074, 50=0,0424, 100=0,0329, 500=0,02474, 1000=0,01944 (USD)", RoHS=Yes, RoHS Compliant=Yes, Series="SMD Comm X7R", Stock 1=4814912, Supplier 1=Digikey, Thickness=0.034inch, Voltage Rating=50V, Width=0.031inch
C14: "Multilayer Ceramic Capacitor, 1 uF, 25 V, ± 10%, X7R, 0805 [2012 Metric]", Capacitance=1uF, Case Code (Metric)=2012, Case Code (Imperial)=0805, Dielectric=X7R, Manufacturer="Kyocera AVX", Manufacturer Part Number=08053C105K4T2A, Max Operating Temperature=125°C, Min Operating Temperature=-55°C, Package Quantity=1, Ratings=AEC-Q200, Supplier Part Number 1=478-KAM21KR71E105KUCT-ND, Tolerance=10%, Voltage Rating=25V, Insulation Resistance=100GR, Case/Package=0805, Category="Ceramic Capacitors", ComponentLink1Description=https://datasheet.ciiva.com/11499/cauto-11499837.pdf?src-supplier=Avnet, ComponentLink1URL=https://datasheet.ciiva.com/11499/cauto-11499837.pdf?src-supplier=Avnet, ComponentLink2Description=https://datasheet.ciiva.com/22682/1679506-22682869.pdf?src-supplier=Element14, ComponentLink2URL=https://datasheet.ciiva.com/22682/1679506-22682869.pdf?src-supplier=Element14, ComponentLink3Description=https://datasheet.ciiva.com/28586/1679506-28586101.pdf?src-supplier=Element14, ComponentLink3URL=https://datasheet.ciiva.com/28586/1679506-28586101.pdf?src-supplier=Element14, ComponentLink4Description=https://datasheet.ciiva.com/28586/1679506-28586778.pdf?src-supplier=Element14, ComponentLink4URL=https://datasheet.ciiva.com/28586/1679506-28586778.pdf?src-supplier=Element14, ComponentLink5Description=https://datasheet.ciiva.com/154/cauto-154795.pdf?src-supplier=Digikey, ComponentLink5URL=https://datasheet.ciiva.com/154/cauto-154795.pdf?src-supplier=Digikey, ComponentLink6Description=https://datasheet.ciiva.com/154/cauto-154794.pdf?src-supplier=Digikey, ComponentLink6URL=https://datasheet.ciiva.com/154/cauto-154794.pdf?src-supplier=Digikey, ComponentLink7Description=https://datasheet.ciiva.com/154/cauto-154796.pdf?src-supplier=Digikey, ComponentLink7URL=https://datasheet.ciiva.com/154/cauto-154796.pdf?src-supplier=Digikey, ComponentLink8Description=https://datasheet.ciiva.com/5412/cauto-5412822.pdf?src-supplier=Mouser, ComponentLink8URL=https://datasheet.ciiva.com/5412/cauto-5412822.pdf?src-supplier=Mouser, Construction=Flat, Depth=1.25mm, Dissipation Factor=12.5%, Height=1.4mm, Lead Free="Lead Free", Length=2.01mm, Material=4241ConductorMaterial, Mount="Surface Mount", Packaging="Tape and Reel", Pricing 1="1=0,32, 10=0,207, 50=0,145, 100=0,1171, 500=0,08702, 1000=0,07614 (USD)", Radiation Hardening=No, Reach SVHC Compliant=No, RoHS=Yes, RoHS Compliant=Yes, Series=-, Stock 1=50944, Supplier 1=Digikey, Termination=SMD/SMT, Thickness=0.037inch, Voltage Rating (DC)=25V, Width=0.049inch
C18 C19: "Multilayer Ceramic Capacitor, 20 pF, 50 V, ± 5%, C0G (NP0), 0603 [1608 Metric]", Manufacturer=Samsung, Manufacturer Part Number=CL10C200JB8NNNC, Supplier Part Number 1=1276-1187-1-ND, Voltage Rating (DC)=50V, Category="Ceramic Capacitors", ComponentLink1Description=https://datasheet.ciiva.com/26877/getdatasheetpartid-640634-26877974.pdf?src-supplier=Verical, ComponentLink1URL=https://datasheet.ciiva.com/26877/getdatasheetpartid-640634-26877974.pdf?src-supplier=Verical, ComponentLink2Description=https://datasheet.ciiva.com/26310/mlcc-catalogdownload2013-eng-26310315.pdf?src-supplier=Distrelec, ComponentLink2URL=https://datasheet.ciiva.com/26310/mlcc-catalogdownload2013-eng-26310315.pdf?src-supplier=Distrelec, Parameter 1=20pF, Pricing 1="1=0,1, 10=0,041, 50=0,0238, 100=0,0184, 500=0,01386, 1000=0,01089 (USD)", RoHS=Yes, Stock 1=288914, Supplier 1=Digikey
D1: library part "LED RED 0805", "LED Uni-Color Hyper Red 660nm 2-Pin Chip 0805(2012Metric) T/R", Case Code (Metric)=2012, Case Code (Imperial)=0805, Color=Red, Forward Current=30mA, Forward Voltage=1.8V, Lens Color=White, Manufacturer="Osram Opto", Max Operating Temperature=85°C, Min Operating Temperature=-30°C, Package Quantity=1, Reverse Voltage=5V, Supplier Part Number 1=475-1415-1-ND, Test Current=20mA, Case/Package=0805, Category=LEDs, ComponentLink1Description=http://www.jameco.com/Jameco/Products/ProdDS/2085634.pdf?src-supplier=Jameco, ComponentLink1URL=http://www.jameco.com/Jameco/Products/ProdDS/2085634.pdf?src-supplier=Jameco, ComponentLink2Description=http://components.arrow.com/part/dataview/0323_01825492?src-supplier=Arrow+Europe, ComponentLink2URL=http://components.arrow.com/part/dataview/0323_01825492?src-supplier=Arrow+Europe, ComponentLink3Description=https://dammedia.osram.info/media/resource/hires/osram-dam-2493888/LH%20R974.pdf?src-supplier=Digi-Key, ComponentLink3URL=https://dammedia.osram.info/media/resource/hires/osram-dam-2493888/LH%20R974.pdf?src-supplier=Digi-Key, ComponentLink4Description=http://www.mouser.com/ds/2/311/LH%20R974%20-%20CHIPLED%200805-318659.pdf?src-supplier=Mouser, ComponentLink4URL=http://www.mouser.com/ds/2/311/LH%20R974%20-%20CHIPLED%200805-318659.pdf?src-supplier=Mouser, ComponentLink5Description=https://www.verical.com/server-webapp/html/getDatasheet?partID=258950&src-supplier=Verical, ComponentLink5URL=https://www.verical.com/server-webapp/html/getDatasheet?partID=258950&src-supplier=Verical, ComponentLink6Description=http://components.arrow.com/part/dataview/41971690S1077610N9133?src-supplier=Arrow+Electronics, ComponentLink6URL=http://components.arrow.com/part/dataview/41971690S1077610N9133?src-supplier=Arrow+Electronics, ComponentLink7Description=http://components.arrow.com/part/dataview/41971690S6190115N2128?src-supplier=Arrow+Electronics, ComponentLink7URL=http://components.arrow.com/part/dataview/41971690S6190115N2128?src-supplier=Arrow+Electronics, Depth=1.35mm, Designed by=BERK, Dominant Wavelength=645nm, Length=2.1mm, Lens Size=1.25mm, Lens Style=Diffused,Flat,Colorless, Lens Transparency=Diffused, Luminous Flux=0.17lm, Luminous Intensity=71mcd, Manufacturer Part Number="LH R974-LP-1", Mount="Surface Mount", Number of Elements=1, Number of Pins=2, Packaging="Tape and Reel", Pricing 1="1=0,26000, 10=0,13900, 100=0,06480, 500=0,05978, 1000=0,04683, 2000=0,04584 (USD)", Radiation Hardening=No, RoHS=Yes, RoHS Compliant=Yes, Series=CHipLED, Stock 1=35632, Supplier 1=Digi-Key, Viewing Angle=160°, Width=1.25mm, Illumination Color=Red
D2: "Schottky Power Rectifier, Surface Mount, Fast Soft-Recovery, 3.0 A, 200 V", Average Rectified Current=3A, Case/Package=SMC, Forward Voltage=590mV, Manufacturer=onsemi, Manufacturer Lifecycle Status=ACTIVE, Manufacturer Part Number=MBRS3201T3G, Max Forward Surge Current (Ifsm)=100A, Max Operating Temperature=150°C, Max Repetitive Reverse Voltage (Vrrm)=200V, Max Reverse Leakage Current=5µA, Min Operating Temperature=-55°C, Category="Schottky Diodes", China RoHS=Non-Compliant, ComponentLink1Description=https://datasheet.octopart.com:443/MBRS3201T3G-onsemi-datasheet-180961793.pdf?src-supplier=IHS, ComponentLink1URL=https://datasheet.octopart.com:443/MBRS3201T3G-onsemi-datasheet-180961793.pdf?src-supplier=IHS, ComponentLink2Description=https://datasheet.octopart.com:443/MBRS3201T3G-ON-Semiconductor-datasheet-139011814.pdf?src-supplier=Upverter, ComponentLink2URL=https://datasheet.octopart.com:443/MBRS3201T3G-ON-Semiconductor-datasheet-139011814.pdf?src-supplier=Upverter, ComponentLink3Description=https://datasheet.octopart.com:443/MBRS3201T3G-ON-Semiconductor-datasheet-12543837.pdf?src-supplier=element14+APAC, ComponentLink3URL=https://datasheet.octopart.com:443/MBRS3201T3G-ON-Semiconductor-datasheet-12543837.pdf?src-supplier=element14+APAC, ComponentLink4Description=https://datasheet.octopart.com:443/MBRS3201T3G.-ON-Semiconductor-datasheet-93401475.pdf?src-supplier=element14+APAC, ComponentLink4URL=https://datasheet.octopart.com:443/MBRS3201T3G.-ON-Semiconductor-datasheet-93401475.pdf?src-supplier=element14+APAC, ComponentLink5Description=https://datasheet.octopart.com:443/MBRS3201T3G-onsemi-datasheet-181959052.pdf?src-supplier=Farnell, ComponentLink5URL=https://datasheet.octopart.com:443/MBRS3201T3G-onsemi-datasheet-181959052.pdf?src-supplier=Farnell, ComponentLink6Description=https://datasheet.octopart.com:443/MBRS3201T3G-ON-Semiconductor-datasheet-8629983.pdf?src-supplier=Factory+Futures, ComponentLink6URL=https://datasheet.octopart.com:443/MBRS3201T3G-ON-Semiconductor-datasheet-8629983.pdf?src-supplier=Factory+Futures, ComponentLink7Description=https://datasheet.octopart.com:443/MBRS3201T3G-onsemi-datasheet-178031918.pdf?src-supplier=Burklin+Elektronik, ComponentLink7URL=https://datasheet.octopart.com:443/MBRS3201T3G-onsemi-datasheet-178031918.pdf?src-supplier=Burklin+Elektronik, ComponentLink8Description=https://datasheet.octopart.com:443/MBRS3201T3G-ON-Semiconductor-datasheet-14055231.pdf?src-supplier=iiiC, ComponentLink8URL=https://datasheet.octopart.com:443/MBRS3201T3G-ON-Semiconductor-datasheet-14055231.pdf?src-supplier=iiiC, ComponentLink9Description=http://sigma.octopart.com:80/15540786/rohs_certificate/ON-Semiconductor-MBRS3201T3G.pdf?src-supplier=Compliance+Statements, ComponentLink9URL=http://sigma.octopart.com:80/15540786/rohs_certificate/ON-Semiconductor-MBRS3201T3G.pdf?src-supplier=Compliance+Statements, ComponentLink10Description=http://sigma.octopart.com:80/15677732/materials_sheet/ON-Semiconductor-MBRS3201T3G.csv?src-supplier=Compliance+Statements, ComponentLink10URL=http://sigma.octopart.com:80/15677732/materials_sheet/ON-Semiconductor-MBRS3201T3G.csv?src-supplier=Compliance+Statements, ComponentLink11Description=http://sigma.octopart.com:80/150614326/rohs_statement/ON-Semiconductor-MBRS3201T3G.pdf?src-supplier=Compliance+Statements, ComponentLink11URL=http://sigma.octopart.com:80/150614326/rohs_statement/ON-Semiconductor-MBRS3201T3G.pdf?src-supplier=Compliance+Statements, ComponentLink12Description=http://sigma.octopart.com:80/reach_statement/ON-Semiconductor-company-79.pdf?src-supplier=Compliance+Statements, ComponentLink12URL=http://sigma.octopart.com:80/reach_statement/ON-Semiconductor-company-79.pdf?src-supplier=Compliance+Statements, ComponentLink13Description=http://sigma.octopart.com:80/rohs_statement/Fairchild-Semiconductor-company-11.pdf?src-supplier=Compliance+Statements, ComponentLink13URL=http://sigma.octopart.com:80/rohs_statement/Fairchild-Semiconductor-company-11.pdf?src-supplier=Compliance+Statements, ComponentLink14Description=http://sigma.octopart.com:80/rohs_statement/Fairchild-Semiconductor-company-10.pdf?src-supplier=Compliance+Statements, ComponentLink14URL=http://sigma.octopart.com:80/rohs_statement/Fairchild-Semiconductor-company-10.pdf?src-supplier=Compliance+Statements, ComponentLink15Description=http://sigma.octopart.com:80/reach_statement/Fairchild-Semiconductor-company-9.pdf?src-supplier=Compliance+Statements, ComponentLink15URL=http://sigma.octopart.com:80/reach_statement/Fairchild-Semiconductor-company-9.pdf?src-supplier=Compliance+Statements, ComponentLink16Description=https://octopart.com:443/opatz8j6/c1?t=TuUUq4bRV-0zdx1kt4Py_fgXTUouEuO5GdwPZmVDZiTJrU9oCiSD5IIYQQ8xSbjZtkxxPs32EPiDbbV4tmAqIVXMxfHL547gP_Zqw_HyF5TIz1EC-R_T3NYZzPP66QvUkHeWnsvo0ZEGyIDzdOYCi1nx6SNd9l5orHh6SZdF6A3TSZ5L5g70psL6arbhBR678gFMbkKBVgNZP2N4oVk_fZo3cWyfAoJBsl2B_1RNyPR_d_uW0hm-Rf8uT4TfymjIZp_K-d9A2zZ7eX9Eesf9Qcn1GDz3mMBQMfQSqQLDIiBNl7v7-n2E8QOF3VMEy-FVfbOajHd8glM5lbxfLzYmrTDPHLcN0AI8a9bVMQ&src-supplier=Compliance+Statements, ComponentLink16URL=https://octopart.com:443/opatz8j6/c1?t=TuUUq4bRV-0zdx1kt4Py_fgXTUouEuO5GdwPZmVDZiTJrU9oCiSD5IIYQQ8xSbjZtkxxPs32EPiDbbV4tmAqIVXMxfHL547gP_Zqw_HyF5TIz1EC-R_T3NYZzPP66QvUkHeWnsvo0ZEGyIDzdOYCi1nx6SNd9l5orHh6SZdF6A3TSZ5L5g70psL6arbhBR678gFMbkKBVgNZP2N4oVk_fZo3cWyfAoJBsl2B_1RNyPR_d_uW0hm-Rf8uT4TfymjIZp_K-d9A2zZ7eX9Eesf9Qcn1GDz3mMBQMfQSqQLDIiBNl7v7-n2E8QOF3VMEy-FVfbOajHd8glM5lbxfLzYmrTDPHLcN0AI8a9bVMQ&src-supplier=Compliance+Statements, ComponentLink17Description=https://octopart.com:443/opatz8j6/c1?t=ICKq1pvA6Uba8JRY5Wr1hgK7ZgodC260k_nHdvo7TMf1pIWfzOgSMehNdOlqql8BI5NKtuG-eo_HRHcUm0T1O19z6UbrWo1TbzBtqCbO9y4HBHkLi5UCBPB9EG5dhp9_xA_85juhNW86tONOFJ_yMKl7muWCSvblTc487DYcLREb7MfRYwPNJySYVWbsmQ3afWNwoGlIaVOn1GFWckPKWszGThWb5RzZu46iJuG7of7eKMjs05gvHjFqUhN9QV8mb0TviGFOJFeuEotKhRo60y9A6GQh8EX_At8sp5oAjJZUuBif5z1oDU_lCj-aQu0XzT8w-0y7qiLMdom0HYlEjvzid3NufuiGpsAZgKg&src-supplier=Compliance+Statements, ComponentLink17URL=https://octopart.com:443/opatz8j6/c1?t=ICKq1pvA6Uba8JRY5Wr1hgK7ZgodC260k_nHdvo7TMf1pIWfzOgSMehNdOlqql8BI5NKtuG-eo_HRHcUm0T1O19z6UbrWo1TbzBtqCbO9y4HBHkLi5UCBPB9EG5dhp9_xA_85juhNW86tONOFJ_yMKl7muWCSvblTc487DYcLREb7MfRYwPNJySYVWbsmQ3afWNwoGlIaVOn1GFWckPKWszGThWb5RzZu46iJuG7of7eKMjs05gvHjFqUhN9QV8mb0TviGFOJFeuEotKhRo60y9A6GQh8EX_At8sp5oAjJZUuBif5z1oDU_lCj-aQu0XzT8w-0y7qiLMdom0HYlEjvzid3NufuiGpsAZgKg&src-supplier=Compliance+Statements, Contact Plating=Tin, Current Rating=3A, Element Configuration=Single, Forward Current=3A, Halogen Free="Halogen Free", Height=2.26mm, Lead Free="Lead Free", Length=7.11mm, Lifecycle Status=Production, Max Output Current=3A, Max Reverse Voltage (DC)=200V, Max Surge Current=100A, Number of Elements=1, Number of Pins=2, Number of Terminals=2, Output Current=3A, Packaging="Tape and Reel", Peak Non-Repetitive Surge Current=100A, Peak Reverse Current=5µA, Polarity=Standard, Pricing 1="2500=0,255, 5000=0,25 (USD)", Radiation Hardening=No, REACH SVHC=No, Recovery Time=35ns, Reverse Recovery Time=35ns, Reverse Standoff Voltage=200V, RoHS=Compliant, Schedule B=8541100080, Stock 1=85000, Supplier 1="Future Electronics", Supplier Part Number 1=MBRS3201T3G, Voltage Rating (DC)=200V, Width=6.1mm
D3: "Rectifier Diode, Schottky, 1 Phase, 1 Element, 3A, 40V V(RRM), Silicon, DO-214AC", Average Rectified Current=3A, Capacitance=200pF, Case/Package=SMA, Forward Voltage=500mV, Manufacturer="Diodes Inc.", Manufacturer Part Number=B340A-13-F, Max Forward Surge Current (Ifsm)=80A, Max Junction Temperature (Tj)=150°C, Max Power Dissipation=850mW, Max Repetitive Reverse Voltage (Vrrm)=40V, Min Operating Temperature=-55°C, Peak Reverse Current=500µA, Category="Schottky Diodes", China RoHS=Non-Compliant, ComponentLink1Description=https://sigma.octopart.com:443/138797046/technical_drawing/Diodes-Inc.-B340A-13-F.pdf?src-supplier=Upverter, ComponentLink1URL=https://sigma.octopart.com:443/138797046/technical_drawing/Diodes-Inc.-B340A-13-F.pdf?src-supplier=Upverter, ComponentLink2Description=https://datasheet.octopart.com:443/B340A-13-F-Diodes-Inc.-datasheet-34441423.pdf?src-supplier=Upverter, ComponentLink2URL=https://datasheet.octopart.com:443/B340A-13-F-Diodes-Inc.-datasheet-34441423.pdf?src-supplier=Upverter, ComponentLink3Description=https://datasheet.octopart.com:443/B340A-13-F-Diodes-Inc.-datasheet-78715517.pdf?src-supplier=Newark, ComponentLink3URL=https://datasheet.octopart.com:443/B340A-13-F-Diodes-Inc.-datasheet-78715517.pdf?src-supplier=Newark, ComponentLink4Description=https://datasheet.octopart.com:443/B340A-13-F-Diodes-Inc.-datasheet-62305030.pdf?src-supplier=Newark, ComponentLink4URL=https://datasheet.octopart.com:443/B340A-13-F-Diodes-Inc.-datasheet-62305030.pdf?src-supplier=Newark, ComponentLink5Description=https://datasheet.octopart.com:443/B340A-13-F-Diodes-Inc.-datasheet-8329522.pdf?src-supplier=element14+APAC, ComponentLink5URL=https://datasheet.octopart.com:443/B340A-13-F-Diodes-Inc.-datasheet-8329522.pdf?src-supplier=element14+APAC, ComponentLink6Description=https://datasheet.octopart.com:443/B340A-13-F-Diodes-Inc.-datasheet-10029573.pdf?src-supplier=element14+APAC, ComponentLink6URL=https://datasheet.octopart.com:443/B340A-13-F-Diodes-Inc.-datasheet-10029573.pdf?src-supplier=element14+APAC, ComponentLink7Description=https://datasheet.octopart.com:443/B340A-13-F-Diodes-Inc.-datasheet-5316735.pdf?src-supplier=element14+APAC, ComponentLink7URL=https://datasheet.octopart.com:443/B340A-13-F-Diodes-Inc.-datasheet-5316735.pdf?src-supplier=element14+APAC, ComponentLink8Description=https://datasheet.octopart.com:443/B340A-13-F-Diodes-Inc.-datasheet-14053334.pdf?src-supplier=iiiC, ComponentLink8URL=https://datasheet.octopart.com:443/B340A-13-F-Diodes-Inc.-datasheet-14053334.pdf?src-supplier=iiiC, ComponentLink9Description=https://datasheet.octopart.com:443/B340A-13-F-Diodes-Inc.-datasheet-8326007.pdf?src-supplier=Future+Electronics, ComponentLink9URL=https://datasheet.octopart.com:443/B340A-13-F-Diodes-Inc.-datasheet-8326007.pdf?src-supplier=Future+Electronics, ComponentLink10Description=http://sigma.octopart.com:80/15616884/materials_sheet/Diodes-Inc.-B340A-13-F.pdf?src-supplier=Compliance+Statements, ComponentLink10URL=http://sigma.octopart.com:80/15616884/materials_sheet/Diodes-Inc.-B340A-13-F.pdf?src-supplier=Compliance+Statements, Contact Plating=Tin, Country of Origin="Mainland China", Current=3A, Current Rating=3A, Element Configuration=Single, Export Control Classification Number (ECCN) Code=EAR99, Forward Current=3A, Harmonized Tariff Schedule (HTS) Code=8541.10.00.80, Height=2.1mm, Lead Free="Lead Free", Length=4.6mm, Lifecycle Status=Production, Max Operating Temperature=150°C, Max Output Current=3A, Max Reverse Voltage (DC)=40V, Mount="Surface Mount", Number of Elements=1, Number of Pins=2, Number of Terminals=2, Output Current=3A, Packaging="Tape and Reel", Peak Non-Repetitive Surge Current=80A, Polarity=Standard, Pricing 1="5000=0,0418, 10000=0,0411, 15000=0,0407, 20000=0,0404, 25000=0,0395 (USD)", Radiation Hardening=No, REACH SVHC=No, Reverse Standoff Voltage=40V, Reverse Voltage=40V, RoHS=Compliant, Schedule B="8541100080, 8541100080|8541100080|8541100080|8541100080|8541100080", Stock 1=3535000, Supplier 1="Future Electronics", Supplier Part Number 1=B340A-13-F, Termination=SMD/SMT, Voltage=40V, Voltage Rating (DC)=40V, Weight=64.013223mg, Width=2.92mm, Introduction Date=2003-02-26
D4 D5 D6 D7: "LED Low-Power Uni-Color Green 565nm 2.1V 2-Pin Chip LED T/R", Case Code (Metric)=2012, Case Code (Imperial)=0805, Color=Green, Forward Current=30mA, Forward Voltage=2.1V, Lens Color=Colorless, Manufacturer="Vishay Lite-On", Manufacturer Part Number=LTST-C171GKT, Max Operating Temperature=85°C, Min Operating Temperature=-55°C, Package Quantity=3000, Power Dissipation=100mW, Reverse Voltage=5V, Supplier Part Number 1=160-1423-6-ND, Test Current=10mA, Case/Package=0805, Category=LEDs, ComponentLink1Description=https://datasheet.ciiva.com/2110/ltst-c171gkt-2110000.pdf?src-supplier=Digikey, ComponentLink1URL=https://datasheet.ciiva.com/2110/ltst-c171gkt-2110000.pdf?src-supplier=Digikey, ComponentLink2Description=https://datasheet.ciiva.com/11773/0900766b80dc0296-11773991.pdf?src-supplier=Rs, ComponentLink2URL=https://datasheet.ciiva.com/11773/0900766b80dc0296-11773991.pdf?src-supplier=Rs, ComponentLink3Description=https://datasheet.ciiva.com/12400/lite-on-ltst-c171gkt-190133-12400647.pdf?src-supplier=Mouser, ComponentLink3URL=https://datasheet.ciiva.com/12400/lite-on-ltst-c171gkt-190133-12400647.pdf?src-supplier=Mouser, ComponentLink4Description=https://datasheet.ciiva.com/2110/ltst-c171gkt-2110001.pdf?src-supplier=Digikey, ComponentLink4URL=https://datasheet.ciiva.com/2110/ltst-c171gkt-2110001.pdf?src-supplier=Digikey, ComponentLink5Description=https://datasheet.ciiva.com/2110/ltst-c171gkt-2110002.pdf?src-supplier=Digikey, ComponentLink5URL=https://datasheet.ciiva.com/2110/ltst-c171gkt-2110002.pdf?src-supplier=Digikey, ComponentLink6Description=https://datasheet.ciiva.com/16396/ltst-c171gkt-16396549.pdf?src-supplier=Future+Electronics, ComponentLink6URL=https://datasheet.ciiva.com/16396/ltst-c171gkt-16396549.pdf?src-supplier=Future+Electronics, Depth=1.25mm, Dominant Wavelength=569nm, Height=0.9mm, Lead Free="Lead Free", Length=2mm, Lens Size=1.25mm, Lens Style=Flat,Diffused,Colorless,Rectangular,Clear, Lens Transparency=Clear, Luminous Intensity=12mcd, Mount="Surface Mount", Number of Elements=1, Number of LEDs=1, Number of Pins=2, Packaging="Tape and Reel", Power Rating=100mW, Pricing 1="1=0,26, 10=0,143, 100=0,0663, 500=0,0612, 1000=0,04794 (USD)", Radiation Hardening=No, RoHS=Yes, RoHS Compliant=Yes, Series=-, Stock 1=370169, Supplier 1=Digikey, Viewing Angle=130°, Wavelength=565nm, Width=1.25mm, Illumination Color=Green
J1: "Conn Shrouded Header HDR 2 POS 5.08mm Solder RA Side Entry Thru-Hole Bag", Manufacturer=CUI, Supplier Part Number 1=102-6406-ND, Designed by=BERK, Manufacturer Part Number=TBP01R1-508-02BE, Pricing 1="1=0,50000, 10=0,26500, 25=0,18760, 50=0,15960, 100=0,15400, 250=0,13020, 500=0,12040, 1000=0,10640, 5000=0,08120 (USD)", RoHS=No, Stock 1=3398, Supplier 1=Digi-Key